# Altium PCB OldLED.PcbDoc
Units mil, origin at the board's own origin, x right, y up, seen from the top; angles counter-clockwise.
Board outline 6000 x 4000 mil, 2 copper layers (Top Layer, Bottom Layer); 17 components, 0 nets, 52 pads, 0 vias.
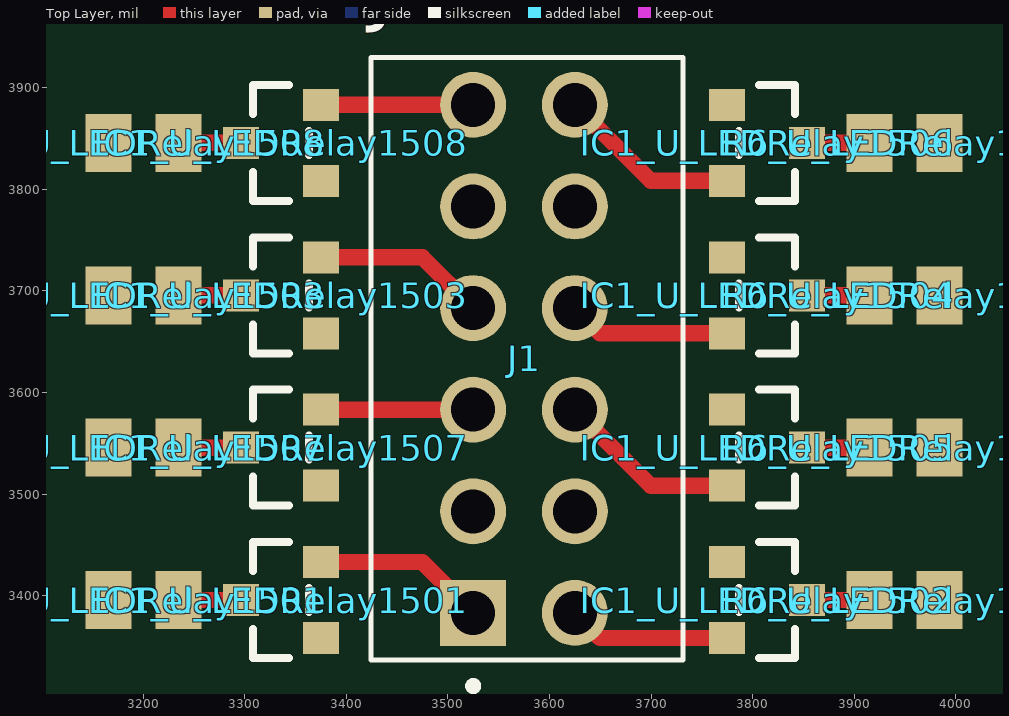
[diagram p0: Top Layer view]
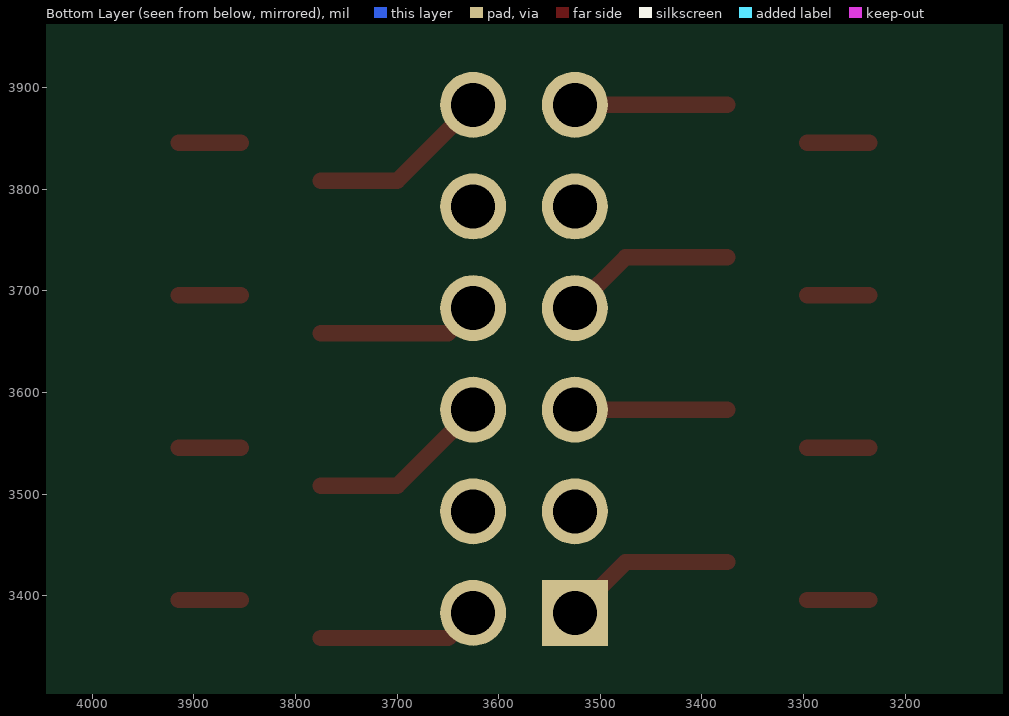
[diagram p1: Bottom Layer view, seen from below]

## Layer stack, top to bottom
Top Solder: solder mask 0.4, Solder Resist, Dk 3.5
Top Layer: signal copper 1.4
Dielectric 1: dielectric 12.6, FR-4, Dk 4.8
Bottom Layer: signal copper 1.4
Bottom Solder: solder mask 0.4, Solder Resist, Dk 3.5

## Board outline
1000,1000 7000,1000 7000,5000 1000,5000

## Design rules (kind name [scope] priority, off if disabled: settings)
Clearance [All] p1: gap=10 ignorepadtopadclearanceinfootprint=FALSE except(0: Arc-Hole Track-Hole SMDPad-Hole THPad-Hole Via-Hole Fill-Hole Poly-Hole Region-Hole Text-Hole)
PolygonConnect [All] p1: connectstyle=Relief reliefconductorwidth=10 reliefentries=4 polygonreliefangle="90 Angle" airgapwidth=10
RoutingVias [All] p1: holewidth=28 width=50 viastyle="Through Hole" minholewidth=28 minwidth=50 maxholewidth=28 maxwidth=50
SolderMaskExpansion [All] p1: expansion=4 istentingtop=FALSE
Width [All] p1: maxlimit=10 minlimit=10 preferedwidth=10
30 further rules are at their usual default settings.

## Components (designator, comment, footprint, x,y, rotation, side; value= is the part's Value field where it differs from the comment)
IC1_U_LEDRelay1501 "DMN3023L-7" "DIODES SOT-23-3" 3335.63,3395.75 r180 top (schematic designator IC1)
IC1_U_LEDRelay1502 "DMN3023L-7" "DIODES SOT-23-3" 3814.37,3395.75 r0 top (schematic designator IC1)
IC1_U_LEDRelay1503 "DMN3023L-7" "DIODES SOT-23-3" 3335.63,3695.75 r180 top (schematic designator IC1)
IC1_U_LEDRelay1504 "DMN3023L-7" "DIODES SOT-23-3" 3814.37,3695.75 r0 top (schematic designator IC1)
IC1_U_LEDRelay1505 "DMN3023L-7" "DIODES SOT-23-3" 3814.37,3545.75 r0 top (schematic designator IC1)
IC1_U_LEDRelay1506 "DMN3023L-7" "DIODES SOT-23-3" 3814.37,3845.75 r0 top (schematic designator IC1)
IC1_U_LEDRelay1507 "DMN3023L-7" "DIODES SOT-23-3" 3335.63,3545.75 r180 top (schematic designator IC1)
IC1_U_LEDRelay1508 "DMN3023L-7" "DIODES SOT-23-3" 3335.63,3845.75 r180 top (schematic designator IC1)
J1 "91687-306LF" AMPHENOL_91687-306LF 3575,3633.15 r90 top
R6_U_LEDRelay1501 "ERJ-6ENF1500V" RESC2013X70X40NL20T20 3200.63,3395.75 r180 top value=150 (schematic designator R6)
R6_U_LEDRelay1502 "ERJ-6ENF1500V" RESC2013X70X40NL20T20 3949.37,3395.75 r0 top value=150 (schematic designator R6)
R6_U_LEDRelay1503 "ERJ-6ENF1500V" RESC2013X70X40NL20T20 3200.63,3695.75 r180 top value=150 (schematic designator R6)
R6_U_LEDRelay1504 "ERJ-6ENF1500V" RESC2013X70X40NL20T20 3949.37,3695.75 r0 top value=150 (schematic designator R6)
R6_U_LEDRelay1505 "ERJ-6ENF1500V" RESC2013X70X40NL20T20 3949.37,3545.75 r0 top value=150 (schematic designator R6)
R6_U_LEDRelay1506 "ERJ-6ENF1500V" RESC2013X70X40NL20T20 3949.37,3845.75 r0 top value=150 (schematic designator R6)
R6_U_LEDRelay1507 "ERJ-6ENF1500V" RESC2013X70X40NL20T20 3200.63,3545.75 r180 top value=150 (schematic designator R6)
R6_U_LEDRelay1508 "ERJ-6ENF1500V" RESC2013X70X40NL20T20 3200.63,3845.75 r180 top value=150 (schematic designator R6)

## Footprints (in the part's own frame and the unit in brackets; to place one, negate y for a bottom-side part, rotate by r counter-clockwise, add the part's x,y. Pads: shape width x height; smd on the part's side, far side on the other; paste and mask are expansions set on the pad)
AMPHENOL_91687-306LF [mm]
  rect 1.65x1.65 hole 1.1: A1(-6.35,1.27)
  round 1.65 hole 1.1: A2(-3.81,1.27) A3(-1.27,1.27) A4(1.27,1.27) A5(3.81,1.27) A6(6.35,1.27) B1(-6.35,-1.27) B2(-3.81,-1.27) B3(-1.27,-1.27) B4(1.27,-1.27) B5(3.81,-1.27) B6(6.35,-1.27)
  silkscreen extent -8.28,-3.97 7.53,3.83, body extent -7.53,-3.9 7.53,3.9, height 9.34
"DIODES SOT-23-3" [mm] "SOT23, 3-Leads, Body 2.90x2.40mm, Pitch 0.95mm, IPC Medium Density"
  rect 0.9x0.8 smd: 1(-1,0.95) 2(-1,-0.95) 3(1,0)
  silkscreen extent -0.7,-1.45 0.7,1.45, body extent -1.41,-1.45 1.41,1.45, height 1.5
RESC2013X70X40NL20T20 [mm] "Chip Resistor, 2-Leads, Body 2.00x1.25mm, IPC Medium Density"
  rect 1.15x1.45 smd: 1(-0.875,0) 2(0.875,0)
  body extent -1.1,-0.72 1.1,0.72, height 0.7

## Part data
IC1_U_LEDRelay1501 IC1_U_LEDRelay1502 IC1_U_LEDRelay1503 IC1_U_LEDRelay1504 IC1_U_LEDRelay1505 IC1_U_LEDRelay1506 IC1_U_LEDRelay1507 IC1_U_LEDRelay1508: library part CMP-276-000124-1, "MOSFET N-CH 30V 6.2A SOT23", Current - Continuous Drain (Id) @ 25°C="6.2A (Ta)", Drain to Source Voltage (Vdss)="30 V", Drive Voltage (Max Rds On,  Min Rds On)="2.5V, 10V", Input Capacitance (Ciss) (Max) @ Vds="873 pF @ 15 V", Manufacturer="Diodes Incorporated", Operating Temperature="-55°C ~ 150°C (TJ)", Package / Case="TO-236-3, SC-59, SOT-23-3", Power Dissipation (Max)="900mW (Ta)", Supplier Device Package=SOT-23-3, ComponentLink1Description=Datasheet, ComponentLink1URL=https://www.diodes.com/assets/Datasheets/DMN3023L.pdf, ComponentLink2Description="DigiKey Link", ComponentLink2URL=https://www.digikey.com/en/products/detail/diodes-incorporated/DMN3023L-7/5453119, FET Type=N-Channel, Gate Charge (Qg) (Max) @ Vgs="18.4 nC @ 10 V", LastUpdated="9/18/2022 1:01:24 PM", Lifecycle Status=Active, Minimum Order=1, Mounting Type="Surface Mount", Packaging=TapeAndReel, Part Number=DMN3023L-7, Part Status=Active, Price=0.11, Rds On (Max) @ Id, Vgs="25mOhm @ 4A, 10V", Series=-, Technology="MOSFET (Metal Oxide)", Vgs (Max)=±20V, Vgs(th) (Max) @ Id="1.8V @ 250µA"
J1: library part CMP-503-000000-2, "Conn Shrouded Header HDR 12 POS 2.54mm Solder ST Thru-Hole Poly Bag", Color=Blue, Max Operating Temperature=125°C, Max Voltage Rating (AC)=1kV, Min Operating Temperature=-40°C, Package=None, Package Quantity=500, Availability=Unavailable, Connector Type="Male Pin", Contact Material=Bronze, Contact Mating Length=0.197inch, Contact Plating=Gold,GXT, Contact Type="Male Pin", Depth=7.8mm, Design Item ID=91687-306LF, Housing Color=Blue, Housing Material=Polyester, Length=15.06mm, MF="{'manufacturer': u'Amphenol ICC (FCI)'}", Mounting Technology="Through Hole", MP=91687-306LF, Number of Contacts=12, Number of Positions=12, Number of Rows=2, Orientation=Straight, Packaging=Rail/Tube, Pitch=2.54mm, Price=None, RoHS Compliant=Yes, Row Spacing=0.1inch, Series="DUBOX™, MezzSelect™, Basics+", Source=91687-306LF.SchLib, Termination=Solder
R6_U_LEDRelay1501 R6_U_LEDRelay1502 R6_U_LEDRelay1503 R6_U_LEDRelay1504 R6_U_LEDRelay1505 R6_U_LEDRelay1506 R6_U_LEDRelay1507 R6_U_LEDRelay1508: library part CMP-009-00221-1, "RES SMD 150 OHM 1% 1/8W 0805", Case Code (Imperial)=0805, Case Code (Metric)=2012, Max Operating Temperature=155°C, Max Power Dissipation=125mW, Min Operating Temperature=-55°C, Package Quantity=5000, Ratings=AEC-Q200, Resistance Tolerance=1%, Resistor Type="Thick Film", Temperature Coefficient=100ppm/°C, Voltage Rating=150V, Case/Package=0805, Construction=Rectangular, Contact Plating=Tin, Depth=1.25mm, Features="Automotive AEC-Q200", Height=0.6mm, Lead Free="Lead Free", Length=2mm, Military Standard=Not, Mounting Technology="Surface Mount", Number of Terminations=2, Packaging="Tape and Reel", Pins=2, Power Rating=125mW, Radiation Hardening=No, Reach SVHC Compliant=Yes, RoHS Compliant=Yes, Series=ERJ, Technology="THICK FILM", Termination=SMD/SMT, Tolerance=1%, Voltage Rating (DC)=150V, Width=1.2mm, Working Voltage=150V

## Nets (pads, with @x,y where several pads share a name; then routed paths per layer and width w, separated by ;. In a path a pad name is that pad's centre, name@x,y a point inside that pad or via, vN(x,y) a via of type N, cw(c..) or ccw(c..) an arc to the next point about the centre after c; other vN are vias at no path point)
pads on no net: IC1_U_LEDRelay1501.1 IC1_U_LEDRelay1501.2 IC1_U_LEDRelay1501.3 IC1_U_LEDRelay1502.1 IC1_U_LEDRelay1502.2 IC1_U_LEDRelay1502.3 IC1_U_LEDRelay1503.1 IC1_U_LEDRelay1503.2 IC1_U_LEDRelay1503.3 IC1_U_LEDRelay1504.1 IC1_U_LEDRelay1504.2 IC1_U_LEDRelay1504.3 IC1_U_LEDRelay1505.1 IC1_U_LEDRelay1505.2 IC1_U_LEDRelay1505.3 IC1_U_LEDRelay1506.1 IC1_U_LEDRelay1506.2 IC1_U_LEDRelay1506.3 IC1_U_LEDRelay1507.1 IC1_U_LEDRelay1507.2 IC1_U_LEDRelay1507.3 IC1_U_LEDRelay1508.1 IC1_U_LEDRelay1508.2 IC1_U_LEDRelay1508.3 J1.A1 J1.A2 J1.A3 J1.A4 J1.A5 J1.A6 J1.B1 J1.B2 J1.B3 J1.B4 J1.B5 J1.B6 R6_U_LEDRelay1501.1 R6_U_LEDRelay1501.2 R6_U_LEDRelay1502.1 R6_U_LEDRelay1502.2 R6_U_LEDRelay1503.1 R6_U_LEDRelay1503.2 R6_U_LEDRelay1504.1 R6_U_LEDRelay1504.2 R6_U_LEDRelay1505.1 R6_U_LEDRelay1505.2 R6_U_LEDRelay1506.1 R6_U_LEDRelay1506.2 R6_U_LEDRelay1507.1 R6_U_LEDRelay1507.2 R6_U_LEDRelay1508.1 R6_U_LEDRelay1508.2
copper on no net: | length 1813.4
  Top Layer w16: 3235.08,3395.75 3296.26,3395.75 ; 3235.08,3545.75 3296.26,3545.75 ; 3235.08,3695.75 3296.26,3695.75 ; 3235.08,3845.75 3296.26,3845.75 ; 3375,3433.15 3475,3433.15 3525,3383.15 ; 3375,3583.15 3525,3583.15 ; 3375,3733.15 3475,3733.15 3525,3683.15 ; 3375,3883.15 3525,3883.15 ; 3625,3383.15 3649.8,3358.35 3775,3358.35 ; 3625,3583.15 3699.8,3508.35 3775,3508.35 ; 3625,3683.15 3649.8,3658.35 3775,3658.35 ; 3625,3883.15 3699.8,3808.35 3775,3808.35 ; 3853.74,3395.75 3914.92,3395.75 ; 3853.74,3545.75 3914.92,3545.75 ; 3853.74,3695.75 3914.92,3695.75 ; 3853.74,3845.75 3914.92,3845.75